# Altium PCB PCB.PcbDoc
Units mm, origin at the board's own origin, x right, y up, seen from the top; angles counter-clockwise.
Board outline 218.05 x 40.05 mm, 2 copper layers (Top Layer, Bottom Layer), stack 1.535 mm thick; 91 components, 70 nets, 452 pads, 108 vias.
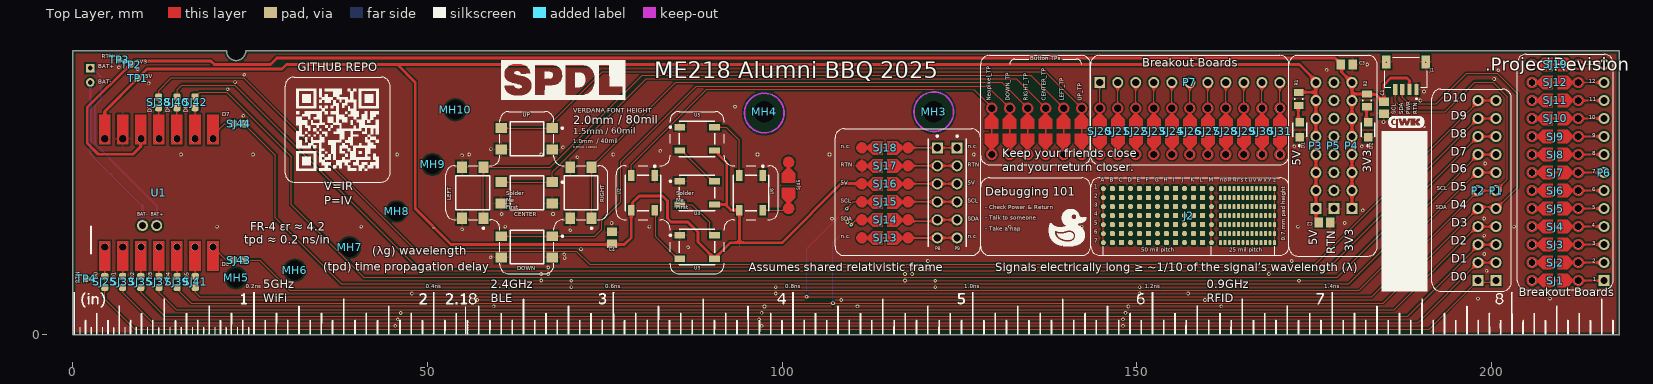
[diagram p0: Top Layer view]
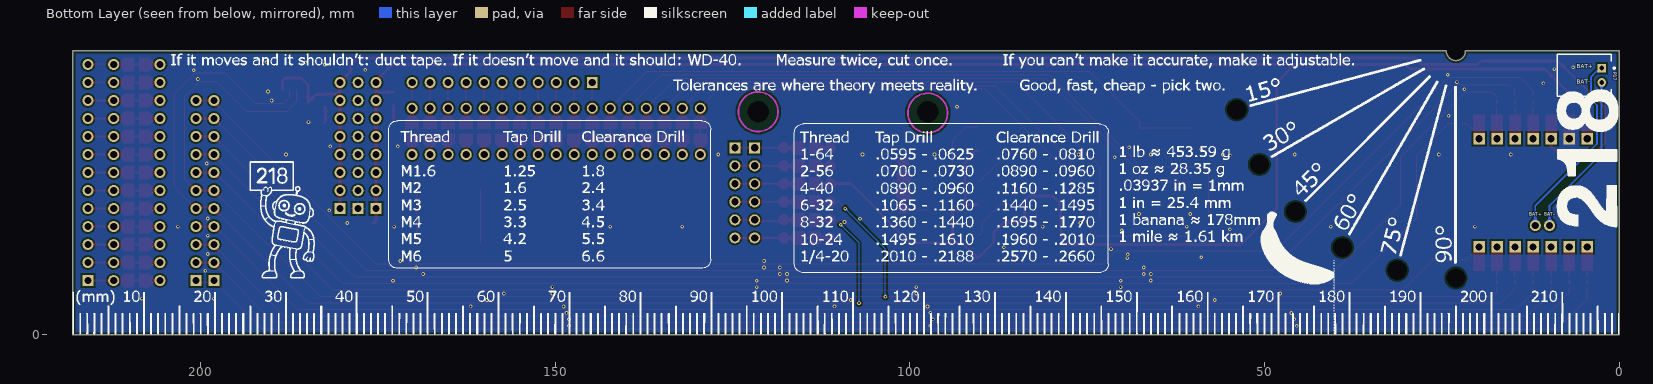
[diagram p1: Bottom Layer view, seen from below]

## Layer stack, top to bottom
Top Solder: solder mask 0.03, Solder Resist, Dk 4
Top Layer: signal copper 0.0175
Dielectric 3: core 1.5, Dk 4.2
Bottom Layer: signal copper 0.0175
Bottom Solder: solder mask 0.03, Solder Resist, Dk 4

## Board outline
0,-0.026 218,-0.026 218.026,0 218.026,40 218,40.026 24.376,40.026 24.349,40 cw(c23,40) 21.651,40 21.625,40.026 0,40.026 -0.026,40

## Design rules (kind name [scope] priority, off if disabled: settings)
AssemblyTestPointUsage [InNetClass('All Nets')] p1 off:
AssemblyTestpoint [(IsPad And (OnTopLayer Or OnBottomLayer)) Or (IsVia) Or (IsPad And OnMultiLayer)] p1 off: testpointundercomponent=FALSE minsize=1.016 maxsize=2.54 preferedsize=1.27 minholesize=0 maxholesize=1.905 preferedholesize=0.889 testpointgrid=2.54 usegrid=TRUE gridoriginx=25.4 gridoriginy=25.4 gridtolerance=0 allowsidetop=TRUE allowsidebottom=TRUE
BoardOutlineClearance BoardOutlineClearance_nosilk [All And Not OnLayer('Top Overlay') And Not OnLayer('Bottom Overlay')] p1: gap=0.381 ignorepadtopadclearanceinfootprint=FALSE
Clearance Clearance_analog [InNetClass('Analog')] p1: gap=0.127 ignorepadtopadclearanceinfootprint=FALSE
Clearance Clearance_digital [InNetClass('Digital')] p2: gap=0.127 ignorepadtopadclearanceinfootprint=FALSE
Clearance Clearance_polygon [InPolygon] p3: gap=0.254 ignorepadtopadclearanceinfootprint=FALSE
Clearance Clearance_Vias_to_Pads [(IsVia) vs (IsPad)] p4: gap=0.254 ignorepadtopadclearanceinfootprint=FALSE
Clearance [All] p5: gap=0.127 ignorepadtopadclearanceinfootprint=FALSE
DiffPairsRouting [All] p1: maxlimit=2.54 minlimit=0.152 mostfreqgap=0.254 toplayer_minwidth=0.152 toplayer_maxwidth=2.54 toplayer_prefwidth=0.254 bottomlayer_minwidth=0.152 bottomlayer_maxwidth=2.54 bottomlayer_prefwidth=0.254 maxuncoupledlength=12.7
FabricationTestPointUsage TestPointUsage [InNetClass('All Nets')] p1 off: valid=0 allowmultiple=FALSE
FabricationTestpoint Testpoint [(IsPad And (OnTopLayer Or OnBottomLayer)) Or (IsVia) Or (IsPad And OnMultiLayer)] p1 off: side=3 testpointundercomponent=TRUE minsize=0.762 maxsize=2.54 preferedsize=1.524 minholesize=0 maxholesize=1.27 preferedholesize=0.813 testpointgrid=0.635 allowsidetop=TRUE allowsidebottom=TRUE usegrid=TRUE gridoriginx=25.4 gridoriginy=25.4 gridtolerance=0
Height [All] p1 off: minheight=0 maxheight=25.4 prefheight=12.7
HoleSize [All] p1: absolutevalues=TRUE maxlimit=12.7 minlimit=0.203 maxpercent=80.000 minpercent=20.000
MinimumAnnularRing [All] p1: minimumring=0.127
MinimumSolderMaskSliver [All] p1 off: minsoldermaskwidth=0.127
PermittedLayers [All] p1: toplayerpermitted=TRUE bottomlayerpermitted=TRUE
PolygonConnect PolygonConnect_Via [All vs IsVia] p1: connectstyle=Direct reliefconductorwidth=0.254 reliefentries=4 polygonreliefangle="90 Angle" airgapwidth=0.254
PolygonConnect [All] p2: connectstyle=Relief reliefconductorwidth=0.254 reliefentries=4 polygonreliefangle="90 Angle" airgapwidth=0.254
RoutingVias [All] p1: holewidth=0.305 width=0.559 viastyle="Through Hole" minholewidth=0.203 minwidth=0.457 maxholewidth=12.7 maxwidth=17.78
SilkToSilkClearance [All] p1 off: silktosilkclearance=0.025
SilkToSolderMaskClearance SilkscreenOverComponentPads [IsPad] p1: minsilkscreentomaskgap=0.076 clearancetoexposedcopper=TRUE
SolderMaskExpansion SolderMaskExpansion_RequireTentedVias [IsVia] p1: expansion=0.102 istentingtop=TRUE
SolderMaskExpansion [All] p2 off: expansion=0.127 istentingtop=FALSE
SupplyNets "Schematic Supply Nets_3" [InNet('RTN')] p1: voltage=0.000
SupplyNets "Schematic Supply Nets_1" [InNet('3V3')] p2: voltage=0.000
SupplyNets "Schematic Supply Nets" [InNet('5V')] p3: voltage=0.000
UnRoutedNet [All] p1: checkbadconnections=TRUE
UnpouredPolygon [All] p1: allowunpoured=TRUE allowshelved=TRUE
Width [All] p1: maxlimit=25.4 minlimit=0.127 preferedwidth=0.152 checkconnectedcopper=TRUE
18 further rules are at their usual default settings.

## Classes and differential pairs
component class U_Main: C1 C2 C3 C4 CENTER CENTER_TP D1 D2 DOWN DOWN_TP J1 J2 LEFT LEFT_TP Neopixel_TP P1 P2 P3 P4 P5 P6 P7 P8 P9 P17 R1 R2 RIGHT RIGHT_TP SJ1 SJ2 SJ3 SJ4 SJ5 SJ6 SJ7 SJ8 SJ9 SJ10 SJ11 SJ12 SJ13 SJ14 SJ15 SJ16 SJ17 SJ18 SJ19 SJ20 SJ21 SJ22 SJ23 SJ24 SJ25 SJ26 SJ27 SJ28 SJ29 SJ30 SJ31 SJ33 SJ35 SJ37 SJ38 SJ39 SJ40 SJ41 SJ42 SJ43 SJ44 SJ45 TP1 TP2 TP3 TP4 U1 U2 U3 U4 U5 U6 UP UP_TP
component class U_Top: MH3 MH4 MH5 MH6 MH7 MH8 MH9 MH10

## Components (designator, comment, footprint, x,y, rotation, side; value= is the part's Value field where it differs from the comment)
C1 "Multilayer Ceramic Capacitor, 1 uF, 50 V, ± 10%, X7R, 0805" FP-GRM21B-0_15-IPC_B 184.836,32 r270 top value=1uF
C2 "Multilayer Ceramic Capacitor, 1 uF, 50 V, ± 10%, X7R, 0805" FP-GRM21B-0_15-IPC_B 176.467,15.791 r0 top value=1uF
C3 "Multilayer Ceramic Capacitor, 1 uF, 50 V, ± 10%, X7R, 0805" FP-GRM21B-0_15-IPC_B 179.613,38.1 r0 top value=1uF
C4 "Multilayer Ceramic Capacitor, 1 uF, 50 V, ± 10%, X7R, 0805" FP-GRM21B-0_15-IPC_B 76.003,13.659 r90 top value=1uF
CENTER "TL3305AF260QG" FP-TL3305AF260QG-MFG 64,20 r180 top
CENTER_TP "SJ CUSTOM and TH NC" "SJ CUSTOM and TH NC" 137.16,28.66 r90 top net-tie
D1 "LSR976-NR-1" FP-LS_R976-MFG 172.963,28.909 r90 top
D2 "LYR976-PS-36" FP-LS_R976-MFG 182.609,28.872 r90 top
DOWN "TL3305AF260QG" FP-TL3305AF260QG-MFG 64,12.38 r180 top
DOWN_TP "SJ CUSTOM and TH NC" "SJ CUSTOM and TH NC" 132.08,28.66 r90 top net-tie
J1 "QWIIC JST CONNECTOR" SPARKFUN_PRT-14417 187.952,37.01 r180 top
J2 "ProtoPads" "New footprint 1" 145.295,20.596 r0 top
LEFT "TL3305AF260QG" FP-TL3305AF260QG-MFG 56.38,20 r90 top
LEFT_TP "SJ CUSTOM and TH NC" "SJ CUSTOM and TH NC" 139.7,28.66 r90 top net-tie
MH3 "PTH 4-40 Close Fit" "mount hole 4-40 Close"#1 121.376,31.43 r0 top
MH4 "PTH 4-40 Close Fit" "mount hole 4-40 Close"#2 97.475,31.252 r270 top locked
MH5 "2.7mm hole" "2.7mm hole (no keepout)" 23,8 r0 top locked
MH6 "2.7mm hole" "2.7mm hole (no keepout)" 31.28,9.09 r0 top locked
MH7 "2.7mm hole" "2.7mm hole (no keepout)" 39,12.29 r0 top locked
MH8 "2.7mm hole" "2.7mm hole (no keepout)" 45.63,17.37 r0 top locked
MH9 "2.7mm hole" "2.7mm hole (no keepout)" 50.71,24 r0 top locked
MH10 "2.7mm hole" "2.7mm hole (no keepout)" 53.91,31.72 r0 top locked
Neopixel_TP "SJ CUSTOM and TH NC" "SJ CUSTOM and TH NC" 129.54,28.66 r90 top net-tie
P1 "HDR 11 POS 100mil 2.54mm" "HDR 11 POS 100mil 2.54mm no outline" 200.66,7.62 r90 top
P2 "HDR 11 POS 100mil 2.54mm" "HDR 11 POS 100mil 2.54mm no outline" 198.12,7.62 r90 top
P3 "HDR 08 POS 100mil 2.54mm" "HDR 08 POS 100mil 2.54mm no outline" 175.26,17.78 r90 top
P4 "HDR 08 POS 100mil 2.54mm" "HDR 08 POS 100mil 2.54mm no outline" 180.34,17.78 r90 top
P5 "HDR 08 POS 100mil 2.54mm" "HDR 08 POS 100mil 2.54mm no outline" 177.8,17.78 r90 top
P6 "HDR 13 POS 100mil 2.54mm" "HDR 13 POS 100mil 2.54mm No Outline" 215.9,7.62 r90 top
P7 "HDR 11 POS 100mil 2.54mm" "HDR 11 POS 100mil 2.54mm no outline" 144.78,35.56 r0 top
P8 "HDR 06 POS 100mil 2.54mm" "HDR 06 POS 100mil 2.54mm" 121.88,26.35 r270 top
P9 "HDR 06 POS 100mil 2.54mm" "HDR 06 POS 100mil 2.54mm" 124.67,26.35 r270 top
P17 "S2B-PH-K-S(LF)(SN)" JST-S2B-PH-K-S_V 4.885,36.575 r270 bottom
R1 "SMD Chip Resistor, 300 Ohm, ± 1%, 125 mW, 0805" RESC2013X60X35NL10T20 172.82,33.241 r270 top value=300
R2 "SMD Chip Resistor, 130 Ohm, ±1%, 125 mW, 0805" RESC2013X60X35NL10T20 182.466,33.042 r270 top value=130
RIGHT "TL3305AF260QG" FP-TL3305AF260QG-MFG 71.62,20 r90 top
RIGHT_TP "SJ CUSTOM and TH NC" "SJ CUSTOM and TH NC" 134.62,28.66 r90 top net-tie
SJ1 "SJ CUSTOM and TH NC" "SJ CUSTOM and TH NC" 209.001,7.62 r0 top net-tie
SJ2 "SJ CUSTOM and TH NC" "SJ CUSTOM and TH NC" 209.001,10.16 r0 top net-tie
SJ3 "SJ CUSTOM and TH NC" "SJ CUSTOM and TH NC" 209.001,12.7 r0 top net-tie
SJ4 "SJ CUSTOM and TH NC" "SJ CUSTOM and TH NC" 209.001,15.24 r0 top net-tie
SJ5 "SJ CUSTOM and TH NC" "SJ CUSTOM and TH NC" 209.001,17.78 r0 top net-tie
SJ6 "SJ CUSTOM and TH NC" "SJ CUSTOM and TH NC" 209.001,20.32 r0 top net-tie
SJ7 "SJ CUSTOM and TH NC" "SJ CUSTOM and TH NC" 209.001,22.86 r0 top net-tie
SJ8 "SJ CUSTOM and TH NC" "SJ CUSTOM and TH NC" 209.001,25.4 r0 top net-tie
SJ9 "SJ CUSTOM and TH NC" "SJ CUSTOM and TH NC" 209.001,27.94 r0 top net-tie
SJ10 "SJ CUSTOM and TH NC" "SJ CUSTOM and TH NC" 209.001,30.48 r0 top net-tie
SJ11 "SJ CUSTOM and TH NC" "SJ CUSTOM and TH NC" 209.001,33.02 r0 top net-tie
SJ12 "SJ CUSTOM and TH NC" "SJ CUSTOM and TH NC" 209.001,35.56 r0 top net-tie
SJ13 "SJ CUSTOM SMD NC" "SJ CUSTOM SMD NC" 114.5,13.65 r0 top net-tie
SJ14 "SJ CUSTOM SMD NC" "SJ CUSTOM SMD NC" 114.5,16.19 r0 top net-tie
SJ15 "SJ CUSTOM SMD NC" "SJ CUSTOM SMD NC" 114.5,18.73 r0 top net-tie
SJ16 "SJ CUSTOM SMD NC" "SJ CUSTOM SMD NC" 114.5,21.27 r0 top net-tie
SJ17 "SJ CUSTOM SMD NC" "SJ CUSTOM SMD NC" 114.5,23.81 r0 top net-tie
SJ18 "SJ CUSTOM SMD NC" "SJ CUSTOM SMD NC" 114.5,26.35 r0 top net-tie
SJ19 "SJ CUSTOM and TH NC" "SJ CUSTOM and TH NC" 209.001,38.1 r0 top net-tie
SJ20 "SJ CUSTOM and TH NO" "SJ CUSTOM and TH NO" 144.78,28.66 r90 top net-tie
SJ21 "SJ CUSTOM and TH NO" "SJ CUSTOM and TH NO" 147.32,28.66 r90 top net-tie
SJ22 "SJ CUSTOM and TH NO" "SJ CUSTOM and TH NO" 149.86,28.66 r90 top net-tie
SJ23 "SJ CUSTOM and TH NO" "SJ CUSTOM and TH NO" 152.4,28.66 r90 top net-tie
SJ24 "SJ CUSTOM and TH NO" "SJ CUSTOM and TH NO" 154.94,28.66 r90 top net-tie
SJ25 "Solder Jumper 0603 Normally Closed" "SolderJumper SPST NC 0603" 4.508,7.431 r90 top net-tie
SJ26 "SJ CUSTOM and TH NO" "SJ CUSTOM and TH NO" 157.48,28.66 r90 top net-tie
SJ27 "SJ CUSTOM and TH NO" "SJ CUSTOM and TH NO" 160.02,28.66 r90 top net-tie
SJ28 "SJ CUSTOM and TH NO" "SJ CUSTOM and TH NO" 162.56,28.66 r90 top net-tie
SJ29 "SJ CUSTOM and TH NO" "SJ CUSTOM and TH NO" 165.1,28.66 r90 top net-tie
SJ30 "SJ CUSTOM and TH NO" "SJ CUSTOM and TH NO" 167.64,28.66 r90 top net-tie
SJ31 "SJ CUSTOM and TH NO" "SJ CUSTOM and TH NO" 170.18,28.66 r90 top net-tie
SJ33 "Solder Jumper 0603 Normally Closed" "SolderJumper SPST NC 0603" 7.01,7.431 r90 top net-tie
SJ35 "Solder Jumper 0603 Normally Closed" "SolderJumper SPST NC 0603" 9.576,7.431 r90 top net-tie
SJ37 "Solder Jumper 0603 Normally Closed" "SolderJumper SPST NC 0603" 12.141,7.431 r90 top net-tie
SJ38 "Solder Jumper 0603 Normally Closed" "SolderJumper SPST NC 0603" 12.103,32.766 r90 top net-tie
SJ39 "Solder Jumper 0603 Normally Closed" "SolderJumper SPST NC 0603" 14.707,7.431 r90 top net-tie
SJ40 "Solder Jumper 0603 Normally Closed" "SolderJumper SPST NC 0603" 14.673,32.766 r90 top net-tie
SJ41 "Solder Jumper 0603 Normally Closed" "SolderJumper SPST NC 0603" 17.272,7.431 r90 top net-tie
SJ42 "Solder Jumper 0603 Normally Closed" "SolderJumper SPST NC 0603" 17.242,32.766 r90 top net-tie
SJ43 "Solder Jumper 0603 Normally Closed" "SolderJumper SPST NC 0603" 23.368,10.541 r180 top net-tie
SJ44 "Solder Jumper 0603 Normally Closed" "SolderJumper SPST NC 0603" 23.36,29.718 r0 top net-tie
SJ45 "SJ CUSTOM SMD NO" "SJ CUSTOM SMD NO" 100.911,21.057 r90 top net-tie
TP1 "Testpoint 35mil SMT Round" "Testpoint Round 35mil" 9.162,36.162 r0 top
TP2 "Testpoint 35mil SMT Round" "Testpoint Round 35mil" 8.211,38.091 r0 top
TP3 "Testpoint 35mil SMT Round" "Testpoint Round 35mil" 6.501,38.796 r0 top
TP4 "Testpoint 35mil SMT Round" "Testpoint Round 35mil" 1.905,7.874 r0 top
U1 "Seeedstudio XIAO" "Seeeduino XIAO-Footprint-Both" 4.483,12.38 r90 top locked
U2 "1655 NeoPixel 5050 RGB LED" ADA-RGB-1655_V 80.38,20 r270 top
U3 "1655 NeoPixel 5050 RGB LED" ADA-RGB-1655_V 88,12.38 r0 top
U4 "1655 NeoPixel 5050 RGB LED" ADA-RGB-1655_V 88,20 r0 top
U5 "1655 NeoPixel 5050 RGB LED" ADA-RGB-1655_V 88,27.62 r0 top
U6 "1655 NeoPixel 5050 RGB LED" ADA-RGB-1655_V 95.62,20 r270 top
UP "TL3305AF260QG" FP-TL3305AF260QG-MFG 64,27.62 r180 top
UP_TP "SJ CUSTOM and TH NC" "SJ CUSTOM and TH NC" 142.24,28.66 r90 top net-tie

## Footprints (in the part's own frame and the unit in brackets; to place one, negate y for a bottom-side part, rotate by r counter-clockwise, add the part's x,y. Pads: shape width x height; smd on the part's side, far side on the other; paste and mask are expansions set on the pad)
"2.7mm hole (no keepout)" [mm]
  round 0 hole 2.7 unplated paste-2539.97: 1(0,0)
ADA-RGB-1655_V [mm] "SMD, 4-Leads, Body 5x5mm"
  rect 1.5x0.9 smd: 1(-2.45,1.65) 2(-2.45,-1.65) 3(2.45,-1.65) 4(2.45,1.65)
  silkscreen extent -3.87,-2.5 2.5,2.5, body extent -2.7,-2.5 2.7,2.5, height 1.68
FP-GRM21B-0_15-IPC_B [mm]
  rect 1.206x1.408 smd paste+0 mask+0: 1(-0.826,0) 2(0.826,0)
  body extent -1.68,-0.95 1.68,0.95, height 0.25
FP-LS_R976-MFG [mm]
  rect 1.2x1.2 smd paste+0 mask+0: 1(-1.05,0) 2(1.05,0)
  silkscreen extent -2.37,-0.97 1,0.97, body extent -1.75,-0.8 1.75,0.8, height 0.25
FP-TL3305AF260QG-MFG [mm]
  rect 1.6x1.4 smd paste+0 mask+0: 1(-3.6,-1.5) 2(3.6,-1.5) 3(-3.6,1.5) 4(3.6,1.5)
  silkscreen extent -5.13,-2.37 2.37,2.37, body extent -4.5,-2.47 4.5,2.47, height 0.25
"HDR 06 POS 100mil 2.54mm" [mm] "THD, 06-Leads, 1.55mm pad, 1.016mm hole, Pitch 2.54mm"
  rect 1.55x1.55 hole 1.016: 1(0,0)
  round 1.55 hole 1.016: 2(2.54,0) 3(5.08,0) 4(7.62,0) 5(10.16,0) 6(12.7,0)
  silkscreen extent -1.77,-1.27 13.97,0.13
"HDR 08 POS 100mil 2.54mm no outline" [mm] "THD, 08-Leads, 1.55mm pad, 1.016mm hole, Pitch 2.54mm"
  rect 1.55x1.55 hole 1.016: 1(0,0)
  round 1.55 hole 1.016: 2(2.54,0) 3(5.08,0) 4(7.62,0) 5(10.16,0) 6(12.7,0) 7(15.24,0) 8(17.78,0)
"HDR 11 POS 100mil 2.54mm no outline" [mm] "THD, 11-Leads, 1.55mm pad, 1.016mm hole, Pitch 2.54mm"
  rect 1.55x1.55 hole 1.016: 1(0,0)
  round 1.55 hole 1.016: 2(2.54,0) 3(5.08,0) 4(7.62,0) 5(10.16,0) 6(12.7,0) 7(15.24,0) 8(17.78,0) 9(20.32,0) 10(22.86,0) 11(25.394,0.002)
"HDR 13 POS 100mil 2.54mm No Outline" [mm] "THD, 13-Leads, 1.55mm pad, 1.016mm hole, Pitch 2.54mm No Outline"
  rect 1.55x1.55 hole 1.016: 1(0,0)
  round 1.55 hole 1.016: 2(2.54,0) 3(5.08,0) 4(7.62,0) 5(10.16,0) 6(12.7,0) 7(15.24,0) 8(17.78,0) 9(20.32,0) 10(22.86,0) 11(25.4,0) 12(27.94,0) 13(30.48,0)
JST-S2B-PH-K-S_V [mm] "THD, 2-Leads, Body 7.6x5.9mm, Pitch 2mm"
  rect 1.2x1.2 hole 0.7: 1(-1,2.45)
  round 1.2 hole 0.7: 2(1,2.45)
  silkscreen extent -2.95,-3.8 2.95,4.35, body extent -2.95,-3.8 2.95,3.8, height 4.8
"mount hole 4-40 Close"#1 [mil] "Screw Mounting Hole for 4-40 screw Close"
  round 0 hole 119 unplated paste-99999: 1(0,0)
  Keep-Out Layer circle w10: c0,0 r110
"mount hole 4-40 Close"#2 [mil] "Screw Mounting Hole for 4-40 screw Close"
  round 0 hole 119 unplated paste-99999: 1(-7.01,0.04)
  Keep-Out Layer circle w10: c0,0 r110
"New footprint 1" [mm]
  oct 0.7x0.7 smd mask-0.076: 1(3.81,-7.62) 1(3.81,-6.35) 1(3.81,-5.08) 1(3.81,-3.81) 1(3.81,-2.54) 1(3.81,-1.27) 1(3.81,0) 1(7.62,-7.62) 1(7.62,-6.35) 1(7.62,-5.08) 1(7.62,-3.81) 1(7.62,-2.54) 1(7.62,-1.27) 1(7.62,0) 1(11.43,-7.62) 1(11.43,-6.35) 1(11.43,-5.08) 1(11.43,-3.81) 1(11.43,-2.54) 1(11.43,-1.27) 1(11.43,0)
  round 0.7 smd mask-0.076: 1(15.24,-7.62) 1(15.24,-6.35) 1(15.24,-5.08) 1(15.24,-3.81) 1(15.24,-2.54) 1(15.24,-1.27) 1(15.24,0) A1(0,0) A2(0,-1.27) A3(0,-2.54) A4(0,-3.81) A5(0,-5.08) A6(0,-6.35) A7(0,-7.62)
  oct 0.381x0.7 smd mask-0.076: 1(17.78,-7.62) 1(17.78,-6.35) 1(17.78,-5.08) 1(17.78,-3.81) 1(17.78,-2.54) 1(17.78,-1.27) 1(17.78,0) 1(19.685,-7.62) 1(19.685,-6.35) 1(19.685,-5.08) 1(19.685,-3.81) 1(19.685,-2.54) 1(19.685,-1.27) 1(19.685,0) 1(21.59,-7.62) 1(21.59,-6.35) 1(21.59,-5.08) 1(21.59,-3.81) 1(21.59,-2.54) 1(21.59,-1.27) 1(21.59,0) 1(23.495,-7.62) 1(23.495,-6.35) 1(23.495,-5.08) 1(23.495,-3.81) 1(23.495,-2.54) 1(23.495,-1.27) 1(23.495,0)
  rrect50% 0.7x0.7 smd mask-0.076: 2(5.08,-7.62) 2(5.08,-6.35) 2(5.08,-5.08) 2(5.08,-3.81) 2(5.08,-2.54) 2(5.08,-1.27) 2(5.08,0) 2(8.89,-7.62) 2(8.89,-6.35) 2(8.89,-5.08) 2(8.89,-3.81) 2(8.89,-2.54) 2(8.89,-1.27) 2(8.89,0) 2(12.7,-7.62) 2(12.7,-6.35) 2(12.7,-5.08) 2(12.7,-3.81) 2(12.7,-2.54) 2(12.7,-1.27) 2(12.7,0) B1(1.27,0) B2(1.27,-1.27) B3(1.27,-2.54) B4(1.27,-3.81) B5(1.27,-5.08) B6(1.27,-6.35) B7(1.27,-7.62)
  rrect50% 0.381x0.7 smd mask-0.076: 2(16.51,-7.62) 2(16.51,-6.35) 2(16.51,-5.08) 2(16.51,-3.81) 2(16.51,-2.54) 2(16.51,-1.27) 2(16.51,0) 2(18.415,-7.62) 2(18.415,-6.35) 2(18.415,-5.08) 2(18.415,-3.81) 2(18.415,-2.54) 2(18.415,-1.27) 2(18.415,0) 2(20.32,-7.62) 2(20.32,-6.35) 2(20.32,-5.08) 2(20.32,-3.81) 2(20.32,-2.54) 2(20.32,-1.27) 2(20.32,0) 2(22.225,-7.62) 2(22.225,-6.35) 2(22.225,-5.08) 2(22.225,-3.81) 2(22.225,-2.54) 2(22.225,-1.27) 2(22.225,0) 2(24.13,-7.62) 2(24.13,-6.35) 2(24.13,-5.08) 2(24.13,-3.81) 2(24.13,-2.54) 2(24.13,-1.27) 2(24.13,0)
  rect 0.7x0.7 smd mask-0.076: 3(6.35,-7.62) 3(6.35,-6.35) 3(6.35,-5.08) 3(6.35,-3.81) 3(6.35,-2.54) 3(6.35,-1.27) 3(6.35,0) 3(10.16,-7.62) 3(10.16,-6.35) 3(10.16,-5.08) 3(10.16,-3.81) 3(10.16,-2.54) 3(10.16,-1.27) 3(10.16,0) 3(13.97,-7.62) 3(13.97,-6.35) 3(13.97,-5.08) 3(13.97,-3.81) 3(13.97,-2.54) 3(13.97,-1.27) 3(13.97,0) C1(2.54,0) C2(2.54,-1.27) C3(2.54,-2.54) C4(2.54,-3.81) C5(2.54,-5.08) C6(2.54,-6.35) C7(2.54,-7.62)
  rect 0.381x0.7 smd mask-0.076: 3(17.145,-7.62) 3(17.145,-6.35) 3(17.145,-5.08) 3(17.145,-3.81) 3(17.145,-2.54) 3(17.145,-1.27) 3(17.145,0) 3(19.05,-7.62) 3(19.05,-6.35) 3(19.05,-5.08) 3(19.05,-3.81) 3(19.05,-2.54) 3(19.05,-1.27) 3(19.05,0) 3(20.955,-7.62) 3(20.955,-6.35) 3(20.955,-5.08) 3(20.955,-3.81) 3(20.955,-2.54) 3(20.955,-1.27) 3(20.955,0) 3(22.86,-7.62) 3(22.86,-6.35) 3(22.86,-5.08) 3(22.86,-3.81) 3(22.86,-2.54) 3(22.86,-1.27) 3(22.86,0)
  Top Layer lines w0.127: 0,-7.62 0,0 ; 15.24,-7.62 15.24,0 ; 24.13,-7.62 24.13,0
  silkscreen extent -1.78,-9.4 26.16,1.52, body extent 0.67,-8.22 24.98,0.48, height 1.85
RESC2013X60X35NL10T20 [mm] "Chip Resistor, 2-Leads, Body 2.1x1.35mm, IPC Medium Density"
  rect 1x1.35 smd: 1(-0.9,0) 2(0.9,0)
  silkscreen extent -0.1,-0.58 0.1,0.58, body extent -1.05,-0.68 1.05,0.67, height 0.6
"Seeeduino XIAO-Footprint-Both" [mm]
  round 1.025 / inner round 1.478 / far side rect 1.6x1.6 hole 1: 1(0,0) 2(0,-2.54) 3(0,-5.08) 4(0,-7.62) 5(0,-10.16) 6(0,-12.7) 7(0,-15.24) 8(15.24,-15.24) 9(15.24,-12.7) 10(15.24,-10.16) 11(15.24,-7.62) 12(15.24,-5.08) 13(15.24,-2.54) 14(15.24,0)
  round 1.55 hole 1.016: 15(3,-7.317) 16(3,-5.317)
  Top Layer region: -3.4,0.8 -3.4,-0.8 0.8,-0.8 0.8,0.8 0.8,0.8
  Top Layer region: -3.4,-1.74 -3.4,-3.34 0.8,-3.34 0.8,-1.74 0.8,-1.74
  Top Layer region: -3.4,-4.28 -3.4,-5.88 0.8,-5.88 0.8,-4.28 0.8,-4.28
  Top Layer region: -3.4,-6.82 -3.4,-8.42 0.8,-8.42 0.8,-6.82 0.8,-6.82
  Top Layer region: -3.4,-9.36 -3.4,-10.96 0.8,-10.96 0.8,-9.36 0.8,-9.36
  Top Layer region: -3.4,-11.9 -3.4,-13.5 0.8,-13.5 0.8,-11.9 0.8,-11.9
  Top Layer region: -3.4,-14.44 -3.4,-16.04 0.8,-16.04 0.8,-14.44 0.8,-14.44
  Top Layer region: 18.64,-16.04 18.64,-14.44 14.44,-14.44 14.44,-16.04 14.44,-16.04
  Top Layer region: 18.64,-13.5 18.64,-11.9 14.44,-11.9 14.44,-13.5 14.44,-13.5
  Top Layer region: 18.64,-10.96 18.64,-9.36 14.44,-9.36 14.44,-10.96 14.44,-10.96
  Top Layer region: 18.64,-8.42 18.64,-6.82 14.44,-6.82 14.44,-8.42 14.44,-8.42
  Top Layer region: 18.64,-5.88 18.64,-4.28 14.44,-4.28 14.44,-5.88 14.44,-5.88
  Top Layer region: 18.64,-3.34 18.64,-1.74 14.44,-1.74 14.44,-3.34 14.44,-3.34
  Top Layer region: 18.64,-0.8 18.64,0.8 14.44,0.8 14.44,-0.8 14.44,-0.8
  body extent -1.27,-18.28 16.63,4.32, height 4.5
"SJ CUSTOM and TH NC" [mm]
  round 1.045 / inner round 1.397 / far side round 1.55 hole 1.02 mask-0.762: 1(-3.26,0) 2(3.26,0)
  Top Layer region: 2.507,0.182 1.736,0.953 0.339,0.953 0.339,-0.953 1.736,-0.952 2.507,-0.182 2.678,-0.512 2.983,-0.724 3.352,-0.77 3.7,-0.639 3.946,-0.361 4.035,0 3.946,0.361 3.7,0.639 3.352,0.77 2.983,0.724 2.678,0.512 2.507,0.182
  Top Layer region: -2.507,-0.182 -1.736,-0.953 -0.339,-0.953 -0.339,0.953 -1.736,0.952 -2.507,0.182 -2.678,0.512 -2.983,0.724 -3.352,0.77 -3.7,0.639 -3.946,0.361 -4.035,0 -3.946,-0.361 -3.7,-0.639 -3.352,-0.77 -2.983,-0.724 -2.678,-0.512 -2.507,-0.182
  Top Layer lines w0.254: -0.381,0 0.381,0
"SJ CUSTOM and TH NO" [mm]
  round 1.045 / inner round 1.397 / far side round 1.55 hole 1.02 mask-0.762: 1(-3.26,0) 2(3.26,0)
  Top Layer region: -2.507,-0.182 -1.736,-0.953 -0.339,-0.953 -0.339,0.953 -1.736,0.952 -2.507,0.182 -2.678,0.512 -2.983,0.724 -3.352,0.77 -3.7,0.639 -3.946,0.361 -4.035,0 -3.946,-0.361 -3.7,-0.639 -3.352,-0.77 -2.983,-0.724 -2.678,-0.512 -2.507,-0.182
  Top Layer region: 2.507,0.182 1.736,0.953 0.339,0.953 0.339,-0.953 1.736,-0.952 2.507,-0.182 2.678,-0.512 2.983,-0.724 3.352,-0.77 3.7,-0.639 3.946,-0.361 4.035,0 3.946,0.361 3.7,0.639 3.352,0.77 2.983,0.724 2.678,0.512 2.507,0.182
"SJ CUSTOM SMD NC" [mil]
  round 1 smd paste-99999 mask-20: 1(-128.37,0) 2(128.36,0)
  Top Layer region: 98.71,7.16 68.36,37.5 13.36,37.5 13.36,-37.5 68.36,-37.5 98.71,-7.16 105.45,-20.14 117.45,-28.49 131.97,-30.3 145.66,-25.14 155.37,-14.2 158.88,0 155.37,14.2 145.66,25.14 131.97,30.3 117.45,28.49 105.45,20.14 98.71,7.16
  Top Layer region: -98.71,-7.16 -68.37,-37.5 -13.37,-37.5 -13.37,37.5 -68.37,37.5 -98.71,7.16 -105.45,20.14 -117.45,28.49 -131.97,30.3 -145.66,25.14 -155.37,14.2 -158.88,0 -155.37,-14.2 -145.66,-25.14 -131.97,-30.3 -117.45,-28.49 -105.45,-20.14 -98.71,-7.16
  Top Layer lines w10: -15,0 15,0
"SJ CUSTOM SMD NO" [mil]
  round 1 smd paste-99999 mask-20: 1(-128.37,0) 2(128.37,0)
  Top Layer region: -98.71,-7.16 -68.37,-37.5 -13.37,-37.5 -13.37,37.5 -68.37,37.5 -98.71,7.16 -105.45,20.14 -117.45,28.49 -131.97,30.3 -145.66,25.14 -155.37,14.2 -158.88,0 -155.37,-14.2 -145.66,-25.14 -131.97,-30.3 -117.45,-28.49 -105.45,-20.14 -98.71,-7.16
  Top Layer region: 98.71,7.16 68.37,37.5 13.37,37.5 13.37,-37.5 68.37,-37.5 98.71,-7.16 105.45,-20.14 117.45,-28.49 131.97,-30.3 145.66,-25.14 155.37,-14.2 158.88,0 155.37,14.2 145.66,25.14 131.97,30.3 117.45,28.49 105.45,20.14 98.71,7.16
"SolderJumper SPST NC 0603" [mil] "SolderJumper SPST NC 0603"
  rrect50% 40x40 smd paste-50: 1(-30,0.98) 2(30,0.98)
  Top Layer region: -11,4 -11,-2 11,-2 11,4
SPARKFUN_PRT-14417 [mm]
  rect 0.6x1.55 smd: 1(-1.5,2.45) 2(-0.5,2.45) 3(0.5,2.45) 4(1.5,2.45)
  rect 1.2x1.8 smd: S1(-2.8,-1.425) S2(2.8,-1.425)
  silkscreen extent -3,-2.12 3,3.85, body extent -3,-2.12 3,2.83, height 3.25
"Testpoint Round 35mil" [mil] "Testpoint Round 35mil"
  round 35 smd paste-393.7: 1(0,0)

## Part data
C1 C2 C3 C4: library part CMP-001-00115-11, "Multilayer Ceramic Capacitor, 1 uF, 50 V, ± 10%, X7R, 0805 [2012 Metric]", Case Code (Imperial)=0805, Case Code (Metric)=2012, Dielectric=X7R, Max Operating Temperature=125°C, Min Operating Temperature=-55°C, Package Quantity=10000, Ratings=AEC-Q200, Tolerance=10%, Voltage Rating=50V, Case/Package=0805, Height=1.25mm, Length=0.079inch, Mounting Technology="Surface Mount", Packaging="Tape and Reel", RoHS Compliant=Yes, Series=GCM, Termination=SMD/SMT, Thickness=0.055inch, Voltage Rating (DC)=50V, Weight=0.000335oz, Width=0.049inch
CENTER DOWN LEFT RIGHT UP: library part CMP-011-00020-1, "Keypad Switch, 1 Switches, SPST, Momentary-tactile, 0.05A, 12VDC, 2.45N, Solder Terminal, Surface Mount-straight", RoHS Compliant=Yes
CENTER_TP DOWN_TP LEFT_TP Neopixel_TP RIGHT_TP SJ1 SJ2 SJ3 SJ4 SJ5 SJ6 SJ7 SJ8 SJ9 SJ10 SJ11 SJ12 SJ19 UP_TP: library part CMP-00027-10, "Normally closed custom pad and TH pads"
D1: library part CMP-007-00039-2, "0805 Single Color LED, Super Red, Colorless Diffused, 1.3mm", Forward Voltage=2.5V, Max Operating Temperature=85°C, Min Operating Temperature=-30°C, Mounting Technology="Surface Mount", Pins=2, RoHS Compliant=Yes
D2: library part CMP-007-00044-2, "0805 Single Color LED, Yellow, Colorless Diffused, 1.3mm", Forward Voltage=2.5V, Max Operating Temperature=85°C, Min Operating Temperature=-30°C, Mounting Technology="Surface Mount", Pins=2, RoHS Compliant=Yes
J1: library part CMP-00057-2, "QWIIC JST CONNECTOR - SMD 4-PIN", Package=None, Check_prices=https://www.snapeda.com/parts/PRT-14417/SparkFun+Electronics/view-part/?ref=eda, Component Type=Standard, Design Item ID=PRT-14417, MF="SparkFun Electronics", MP=PRT-14417, Pin Count=4, SnapEDA_Link=https://www.snapeda.com/parts/PRT-14417/SparkFun+Electronics/view-part/?ref=snap, Source=PRT-14417.SchLib
J2: library part CMP-00059-2, "Soldermask defined 27 x 7 SMT Pads Array Solder Mask Defined 50 mil and 25 mil pitch 0.7mm pad"
MH3 MH4: library part CMP-104-000005-1, "4-40 PAN HEAD SCREW CLOSE FIT", Created by=Kuan, Design Item ID="PTH 4-40 Close Fit", Source=Holes.SchLib
MH5 MH6 MH7 MH8 MH9 MH10: library part CMP-00052-1, "2.7mm hole (no keepout) M2.5 tight", Component Type="Standard (No BOM)", Created by=Kylee, Pin Count=0
P1 P2 P7: library part CMP-00053-2
P3 P4 P5: library part CMP-00039-2
P6: library part CMP-00055-1
P8 P9: library part CMP-00040-1
P17: library part CMP-002-00030-3, "Header for PCB; pitch 2.00mm; 2-contacts; THT; male; side entry; 100V/2A", Case/Package=S2B-PH-K-S, Color=Natural,White, Contact Resistance=20mR, Current Rating=2A, Flammability Rating="UL94 V-0", Housing Color=White, Insulation Resistance=1GR, Manufacturer="Japan Solderless Terminals", Max Operating Temperature=85°C, Max Voltage Rating (AC)=100V, Min Operating Temperature=-25°C, Package Description="Male Header, Pitch 2 mm, 1 x 2 Position, Height 4.8 mm, Tail Length 3.4 mm", Connector Type=Header, Contact Material=Brass,Tin,Bronze, Contact Mating Length=0.13inch, Contact Plating=Tin,Copper, Contact Type="Male Pin", Datasheet URL=http://www.jst-mfg.com/product/pdf/eng/ePH.pdf, Datasheet Version=Dec-12, Depth=7.6mm, Fastening Type=Detent, Gender=Male, Height=9.4mm, Housing Material=Polyamide, Lead Free="Lead Free", Lead Pitch=2mm, Length=5.9mm, Max Current Rating=2A, Max Voltage Rating (DC)=100V, Mounting Technology="Through Hole", Number of Contacts=2, Number of Poles=2, Number of Positions=2, Number of Rows=1, Orientation="Right Angle", Package Reference=S2B-PH-K-S, Packaging=Bulk, Pins=2, Pitch=2mm, Reach SVHC Compliant=No, RoHS Compliant=Unknown, Series=PH, Termination=Solder, Voltage Rating=100V, Voltage Rating (AC)=100V, Width=4.5mm, Working Voltage=100V
R1: library part CMP-009-00313-2, "SMD Chip Resistor, 300 Ohm, ± 1%, 125 mW, 0805 [2012 Metric], Thin Film, General Purpose", Case/Package=0805, Max Operating Temperature=155°C, Min Operating Temperature=-55°C, Power=125mW, Tolerance=1%, Mounting Technology="Surface Mount", Pins=2, RoHS Compliant=Yes
R2: library part CMP-009-00312-2, "SMD Chip Resistor, 130 Ohm, ± 1%, 125 mW, 0805 [2012 Metric], Thick Film, Automotive", Case/Package=0805, Max Operating Temperature=155°C, Min Operating Temperature=-55°C, Power=125mW, Tolerance=1%, Mounting Technology="Surface Mount", Pins=2, RoHS Compliant=Yes
SJ13 SJ14 SJ15 SJ16 SJ17 SJ18: library part CMP-00056-3, "Normally closed custom pad surface mount"
SJ20 SJ21 SJ22 SJ23 SJ24 SJ26 SJ27 SJ28 SJ29 SJ30 SJ31: library part CMP-00028-2, "Normally open custom pad and TH pads"
SJ25 SJ33 SJ35 SJ37 SJ38 SJ39 SJ40 SJ41 SJ42 SJ43 SJ44: library part CMP-090-000001-1, Design Item ID="Solder Jumper 0603 Normally Closed", Source="Solder Jumper.SchLib"
SJ45: library part CMP-00060-2, "Normally open custom pad SMD pads"
TP1 TP2 TP3 TP4: library part CMP-075-000017-1, Manufacturer=N/A, Created by=Miguel, Design Item ID="Testpoint 35mil SMT Round", Do Not Populate="Do Not Populate", MPN=N/A, Source=Testpoint.SchLib
U1: library part CMP-00050-2, "Seeed studio XIAO series dev boards"
U2 U3 U4 U5 U6: library part CMP-007-00001-6, "NeoPixel 5050 RGB LED with Integrated Driver Chip - 10 Pack", Case/Package=1655, Color=Blue,Green,Red, Manufacturer="Adafruit Industries", Max Operating Temperature=85°C, Min Operating Temperature=-40°C, Package Description="4-Pin Surface Mount Device, Body 5 x 5 mm", Datasheet URL=http://datasheet.octopart.com/ADA1655-Adafruit-Industries-datasheet-32028139.pdf, Datasheet Version=May-13, Height=1.6mm, Interface=Serial, Length=5mm, Manufacturer URL=https://www.adafruit.com/, Mounting Technology="Surface Mount", Number of LEDs=10, Package Reference=1655, RoHS Compliant=True, Series=Neopixel, Width=5mm

## Via types
v1: diameter 0.508, hole 0.254, Top Layer to Bottom Layer, tented both sides, 106 vias
v2: diameter 0.458, hole 0.203, Top Layer to Bottom Layer, tented both sides, 2 vias

## Nets (pads, with @x,y where several pads share a name; then routed paths per layer and width w, separated by ;. In a path a pad name is that pad's centre, name@x,y a point inside that pad or via, vN(x,y) a via of type N, cw(c..) or ccw(c..) an arc to the next point about the centre after c; other vN are vias at no path point)
3V3: C1.1 C3.1 J1.2 P4.1 P4.2 P4.3 P4.4 P4.5 P4.6 P4.7 P4.8 R2.1 TP2.1 U1.12 | length 229
  Top Layer w0.381: U1.12 9.563,26.563 8.436,25.436 3.564,25.436 2,27 2,32 8.091,38.091 TP2.1 8.713,38.593 19.423,38.593 19.925,38.091 27.843,38.091 28.752,39 177.963,39 178.887,38.076 178.887,37.013 P4.8 180.34,33.942 ; P4.1 P4.2 P4.3 P4.4 P4.5 P4.6 180.34,32.783 P4.7@180.496,32.939 ; P4.7 180.34,33.942 ; C1.1@184.836,32.75 183.712,33.874 182.534,33.874 R2.1 180.34,33.942 ; C1.1 184.836,35.23 185.801,36.195 188.087,36.195 188.452,35.83 J1.2
5V: C2.1 C4.1 P3.1 P3.2 P3.3 P3.4 P3.5 P3.6 P3.7 P3.8 R1.1 SJ16.1 TP1.1 U1.14 U2.3 U3.3 U4.3 U5.3 U6.3 | length 320.9
  Top Layer w0.381: U1.14 4.483,31.483 9.26,36.26 10.465,37.465 29.465,37.465 30.1,38.1 45.72,38.1 45.732,38.088 ; U4.3 91.96,18.35 92.197,18.113 ; U5.3 90.75,25.97 91.01,25.71 91.01,25.411 92.197,24.223 92.197,18.113 ; 92.645,12.925 U3.3 88.118,13.062 88.118,14.457 86.687,15.889 84.314,15.889 83.82,16.383 83.82,18.872 83.134,19.558 79.851,19.558 78.91,18.617 78.91,17.73 U2.3 78.73,13.705 77.734,12.709 76.226,12.709 76.003,12.932 75.787,12.717 53.323,12.717 48.26,17.78 48.26,35.56 45.732,38.088 ; 92.672,12.952 93.979,12.952 ; U6.3 92.76,17.55 92.197,18.113 ; U6.3@93.979,17.541 93.979,12.952 ; 111.306,21.307 108.309,21.307 99.954,12.952 93.979,12.952 ; R1.1@172.801,34.186 175.26,34.186 ; C2.1@175.74,15.791 175.483,15.791 175.26,16.014 P3.1 P3.2 P3.3 P3.4 P3.5 P3.6 P3.7 175.26,34.186 ; 45.732,38.088 142.816,38.088 142.822,38.082 172.936,38.082 175.26,35.758 P3.8 175.26,34.186
BAT+: P17.1 U1.15 | length 27
  Bottom Layer w0.254: P17.1 2.899,37.112 3.213,37.112 3.945,36.379 3.945,33.191 3.099,32.346 3.099,26.901 6.872,23.128 11.8,18.2 U1.15
BAT-: P17.2 U1.16 | length 23.2
  Bottom Layer w0.254: P17.2 2.465,35.546 2.465,25.535 5.428,22.573 9.8,18.2 U1.16
D0: P1.1 P2.1 SJ25.1 | length 202.6
  Top Layer w0.127: SJ25.1@4.483,6.664 4.483,5.007 8.709,0.781 191.213,0.781 197.341,6.909 197.409,6.909 P2.1
  Top Layer w0.152: P2.1 198.376,7.364 200.404,7.364 P1.1
D1: P1.2 P2.2 SJ33.1 | length 199.8
  Top Layer w0.127: SJ33.1 7.035,6.62 7.035,5.92 11.259,1.696 189.656,1.696 198.008,10.048 P2.2@198.12,10.048
  Top Layer w0.152: P2.2@198.12,10.032 198.248,10.16 P1.2 ; P2.2@198.12,10.048 P2.2
D2: P1.3 P2.3 SJ35.1 | length 197.5
  Top Layer w0.127: SJ35.1 9.551,5.969 12.91,2.61 188.175,2.61 P2.3@198.12,12.554
  Top Layer w0.152: P2.3 198.12,12.572 198.248,12.7 P1.3
D3: P1.4 P2.4 SJ37.1 | length 195.2
  Top Layer w0.127: SJ37.1 12.116,5.969 14.573,3.513 186.275,3.513 197.89,15.128 P2.4@198.12,15.128
  Top Layer w0.152: P2.4@198.12,15.112 198.248,15.24 P1.4 ; P2.4@198.12,15.128 P2.4
D6: P1.7 P2.7 SJ43.1 | length 185.3
  Top Layer w0.127: SJ43.1 26.312,10.516 30.573,6.255 181.367,6.255 197.86,22.748 P2.7@198.12,22.748
  Top Layer w0.152: P2.7@198.12,22.732 198.248,22.86 P1.7 ; P2.7@198.12,22.748 P2.7
D7: P1.8 P2.8 SJ44.2 | length 199.3
  Top Layer w0.127: SJ44.2@23.763,29.602 23.622,29.743 24.105,29.743 28.543,25.305 28.543,16.452 37.839,7.157 179.877,7.157 P2.8
  Top Layer w0.152: P2.8 P1.8
D8: P1.9 P2.9 SJ42.2 | length 206.8
  Top Layer w0.127: SJ42.2@17.247,33.528 17.882,34.163 21.717,34.163 30.809,25.071 30.809,18.303 41.016,8.096 178.276,8.096 198.008,27.828 P2.9@198.12,27.828
  Top Layer w0.152: P2.9@198.12,27.812 198.248,27.94 P1.9 ; P2.9@198.12,27.828 P2.9
D9: P1.10 P2.10 SJ40.2 | length 206.9
  Top Layer w0.127: SJ40.2@14.707,33.655 14.707,34.519 15.367,35.179 22.775,35.179 24.682,33.273 48.944,9.011 176.651,9.011 198.008,30.368 P2.10@198.12,30.368
  Top Layer w0.152: P2.10@198.12,30.352 198.248,30.48 P1.10 ; P2.10@198.12,30.368 P2.10
D10: P1.11 P2.11 SJ38.2 | length 210.6
  Top Layer w0.127: SJ38.2@12.078,33.677 12.078,34.411 13.861,36.195 24.057,36.195 48.482,11.771 70.987,11.771 72.832,9.925 175.196,9.925 198.118,32.846 P2.11
  Top Layer w0.152: P2.11 P1.11
I2C.SCL: J1.4 P1.6 P2.6 SJ15.1 SJ41.1 | length 242.6
  Top Layer w0.127: SJ41.1 17.247,5.969 17.872,5.344 v1(103.451,5.344) 183.144,5.344 P2.6 ; v1(109.093,17.78) 110.043,18.73 SJ15.1
  Top Layer w0.152: J1.4 186.452,32.905 187.904,31.454 193.493,31.454 197.648,35.609 200.238,35.609 202.274,33.573 202.274,21.934 200.532,20.192 200.404,20.32 P2.6
  Bottom Layer w0.127: v1(103.451,5.344) 103.451,12.138 v1(109.093,17.78)
I2C.SDA: J1.3 P1.5 P2.5 SJ14.1 SJ39.1 | length 244.8
  Top Layer w0.127: SJ39.1 14.992,6.358 14.992,6.097 16.651,4.439 107.166,4.439 184.727,4.439 198.068,17.78 P2.5 ; v1(109.728,15.494) 110.424,16.19 SJ14.1
  Top Layer w0.152: J1.3 187.452,33.497 188.386,32.563 192.231,32.563 196.502,36.834 200.817,36.834 203.691,33.96 203.691,20.81 P1.5 200.415,18.025 198.365,18.025 P2.5
  Bottom Layer w0.127: v1(107.166,4.446) 107.166,12.932 v1(109.728,15.494)
NetCENTER_1: CENTER.1 CENTER.2 CENTER_TP.2 | length 85.3
  Top Layer w0.152: CENTER.2 CENTER.1 67.6,22.867 80.801,36.068 133.013,36.068 CENTER_TP.2
NetD1_2: D1.2 R1.2 | length 2.5
  Top Layer w0.381: R1.2 172.79,32.311 172.79,30.133 D1.2
NetD2_2: D2.2 R2.2 | length 2.3
  Top Layer w0.381: R2.2 182.385,32.061 182.385,30.146 D2.2
NetDOWN_1: DOWN.1 DOWN.2 DOWN_TP.2 | length 85.8
  Top Layer w0.152: DOWN.2 DOWN.1 73.57,13.88 74.549,14.859 74.549,16.042 77.216,18.709 77.216,24.384 87.884,35.052 128.949,35.052 DOWN_TP.2
NetLEFT_1: LEFT.1 LEFT.2 LEFT_TP.2 | length 96.3
  Top Layer w0.152: LEFT.1 LEFT.2 67.288,23.6 80.264,36.576 135.045,36.576 LEFT_TP.2
NetNeopixel_TP_2: Neopixel_TP.2 U2.2 | length 57.9
  Top Layer w0.152: U2.2 78.73,23.937 89.384,34.591 121.078,34.591 ; 121.079,34.592 121.386,34.592 127.045,34.547 127.089,34.503 129.54,32.052 Neopixel_TP.2
NetP6_1: P6.1 SJ1.2 | length 3.6
  Top Layer w0.254: SJ1.2 P6.1
NetP6_2: P6.2 SJ2.2 | length 3.6
  Top Layer w0.254: SJ2.2 P6.2
NetP6_3: P6.3 SJ3.2 | length 3.6
  Top Layer w0.254: SJ3.2 P6.3
NetP6_4: P6.4 SJ4.2 | length 3.6
  Top Layer w0.254: SJ4.2 P6.4
NetP6_5: P6.5 SJ5.2 | length 3.6
  Top Layer w0.254: SJ5.2 P6.5
NetP6_6: P6.6 SJ6.2 | length 3.6
  Top Layer w0.254: SJ6.2 P6.6
NetP6_7: P6.7 SJ7.2 | length 3.6
  Top Layer w0.254: SJ7.2 P6.7
NetP6_8: P6.8 SJ8.2 | length 3.6
  Top Layer w0.254: SJ8.2 P6.8
NetP6_9: P6.9 SJ9.2 | length 3.6
  Top Layer w0.254: SJ9.2 P6.9
NetP6_10: P6.10 SJ10.2 | length 3.6
  Top Layer w0.254: SJ10.2 P6.10
NetP6_11: P6.11 SJ11.2 | length 3.6
  Top Layer w0.152: SJ11.2 SJ11.2@212.267,33.014
  Top Layer w0.254: SJ11.2@212.267,33.014 P6.11@215.898,33.014
NetP6_12: P6.12 SJ12.2 | length 3.6
  Top Layer w0.152: SJ12.2 P6.12
NetP6_13: P6.13 SJ19.2 | length 3.6
  Top Layer w0.152: SJ19.2 P6.13
NetP7_1: P7.1 SJ20.2 | length 3.6
  Top Layer w0.152: SJ20.2 P7.1
NetP7_2: P7.2 SJ21.2 | length 3.6
  Top Layer w0.152: SJ21.2 P7.2
NetP7_3: P7.3 SJ22.2 | length 3.6
  Top Layer w0.152: SJ22.2 P7.3
NetP7_4: P7.4 SJ23.2 | length 3.6
  Top Layer w0.152: SJ23.2 P7.4
NetP7_5: P7.5 SJ24.2 | length 3.6
  Top Layer w0.152: SJ24.2 P7.5
NetP7_6: P7.6 SJ26.2 | length 3.6
  Top Layer w0.152: SJ26.2 P7.6
NetP7_7: P7.7 SJ27.2 | length 3.6
  Top Layer w0.152: SJ27.2 P7.7
NetP7_8: P7.8 SJ28.2 | length 3.6
  Top Layer w0.152: SJ28.2 P7.8
NetP7_9: P7.9 SJ29.2 | length 3.6
  Top Layer w0.152: SJ29.2 P7.9
NetP7_10: P7.10 SJ30.2 | length 3.6
  Top Layer w0.152: SJ30.2 P7.10
NetP7_11: P7.11 SJ31.2 | length 3.6
  Top Layer w0.152: P7.11 170.174,31.927 SJ31.2
NetP8_1: P8.1 P9.1 SJ18.2 | length 7.2
  Top Layer w0.254: SJ18.2 P9.1@124.42,26.35 ; P8.1@121.53,26 P8.1
NetP8_2: P8.2 P9.2 SJ17.2 | length 6.7
  Top Layer w0.254: SJ17.2 P9.2@124.42,23.81
NetP8_3: P8.3 P9.3 SJ16.2 | length 6.7
  Top Layer w0.254: SJ16.2 P9.3@124.42,21.27
NetP8_4: P8.4 P9.4 SJ15.2 | length 6.7
  Top Layer w0.254: SJ15.2 P9.4@124.42,18.73
NetP8_5: P8.5 P9.5 SJ14.2 | length 6.7
  Top Layer w0.254: 117.76,16 121.69,16 P8.5 P9.5@124.42,16.19
NetP8_6: P8.6 P9.6 SJ13.2 | length 6.7
  Top Layer w0.254: 117.774,13.636 121.866,13.636 P8.6 P9.6@124.42,13.65
NetRIGHT_1: RIGHT.1 RIGHT.2 RIGHT_TP.2 | length 75.2
  Top Layer w0.152: RIGHT.1 73.12,23.7 84.98,35.56 130.981,35.56 RIGHT_TP.2
NetSJ25_2: SJ25.2 U1.1 | length 4.2
  Top Layer w0.127: SJ25.2@4.483,8.188 U1.1
NetSJ33_2: SJ33.2 U1.2 | length 4.2
  Top Layer w0.127: SJ33.2 7.023,8.23 U1.2
NetSJ35_2: SJ35.2 U1.3 | length 4.2
  Top Layer w0.127: SJ35.2@9.563,8.193 U1.3
NetSJ37_2: SJ37.2 U1.4 | length 4.2
  Top Layer w0.127: SJ37.2@12.103,8.193 U1.4
NetSJ38_1: SJ38.1 U1.11 | length 4.5
  Top Layer w0.127: SJ38.1@12.078,32.153 12.103,32.128 U1.11
NetSJ39_2: SJ39.2 U1.5 | length 4.2
  Top Layer w0.127: U1.5 14.682,12.341 SJ39.2
NetSJ40_1: SJ40.1 U1.10 | length 4.5
  Top Layer w0.127: U1.10 14.655,27.632 SJ40.1@14.655,32.079
NetSJ41_2: SJ41.2 U1.6 | length 4.2
  Top Layer w0.127: U1.6 17.247,12.316 SJ41.2
NetSJ42_1: SJ42.1 U1.9 | length 4.4
  Top Layer w0.127: U1.9 17.227,27.664 17.227,31.994 SJ42.1
NetSJ43_2: SJ43.2 U1.7 | length 3.7
  Top Layer w0.127: U1.7 21.587,10.516 SJ43.2
NetSJ44_1: SJ44.1 U1.8 | length 3.5
  Top Layer w0.127: U1.8 19.723,28.066 21.399,29.743 SJ44.1@22.098,29.743
NetSJ45_1: SJ45.1 U6.4 | length 3.7
  Top Layer w0.127: U6.4 100.664,17.55 SJ45.1
NetU2_4: U2.4 U3.2 | length 8.5
  Top Layer w0.152: U2.4 82.169,17.411 82.169,13.811 85.25,10.73 U3.2
NetU3_4: U3.4 U4.2 | length 7.5
  Top Layer w0.152: U4.2 87.243,18.35 89.776,15.817 89.776,14.404 90.15,14.03 U3.4
NetU4_4: U4.4 U5.2 | length 6.7
  Top Layer w0.152: U5.2 85.85,25.97 86.224,25.596 86.224,25.576 90.15,21.65 U4.4
NetU5_4: U5.4 U6.2 | length 9.3
  Top Layer w0.127: U5.4 92.142,29.27 93.97,27.442 U6.2
NetUP_1: UP.1 UP.2 UP_TP.2 | length 87.8
  Top Layer w0.152: UP.2 UP.1 67.6,30.049 74.635,37.084 137.077,37.084 UP_TP.2
RTN: C1.2 C2.2 C3.2 C4.2 CENTER.3 CENTER.4 D1.1 D2.1 DOWN.3 DOWN.4 J1.1 J1.S1 J1.S2 LEFT.3 LEFT.4 P5.1 P5.2 P5.3 P5.4 P5.5 P5.6 P5.7 P5.8 RIGHT.3 RIGHT.4 SJ17.1 TP3.1 TP4.1 U1.13 U2.1 U3.1 U4.1 U5.1 U6.1 UP.3 UP.4
  other v1: 45.445,1.238 97.117,1.238 148.061,1.238 45.798,2.153 96.745,2.153 148.053,2.153 46.209,3.055 97.098,3.067 148.406,3.067 97.509,3.97 148.817,3.97 59.311,3.982 110.619,3.982 161.927,3.982 57.011,4.887 108.319,4.887 159.627,4.887 198.12,5.08 208.28,5.08 47.786,5.798 99.094,5.798 150.402,5.798 157.232,5.801 70.274,6.699 99.086,6.712 121.582,6.699 150.394,6.712 70.266,7.614 121.574,7.614 172.882,7.614 66.017,7.639 117.325,7.639 66.009,8.554 67.016,8.554 117.317,8.554 118.324,8.554 168.625,8.554 199.328,9.015 67.008,9.468 118.316,9.468 120.56,9.468 169.624,9.468 120.552,10.382 171.86,10.382 69.342,10.795 58.913,10.926 69.285,11.313 199.005,11.38 71.628,12.065 86.741,12.319 199.009,13.97 70.104,14.732 54.864,14.859 20.32,15.24 40.64,15.24 60.96,15.24 81.28,15.24 132.08,15.24 142.24,15.24 172.72,15.24 203.2,15.24 75.946,15.748 179.324,15.748 109.218,15.887 107.021,16.355 199.009,16.383 60.452,17.018 67.691,17.018 181.864,17.526 199.136,24.13 71.12,25.019 54.864,25.273 15.24,25.4 25.4,25.4 45.72,25.4 55.88,25.4 66.04,25.4 76.2,25.4 96.52,25.4 106.68,25.4 127,25.4 187.96,25.4 82.804,25.908 58.928,26.162 69.088,26.416 172.212,26.543 181.737,26.543 184.785,29.972 24.037,30.853 93.345,32.131 189.992,33.02 190.5,34.29 21.806,34.603 10.668,35.433 22.864,35.619 200.387,36.051 24.146,36.635 200.966,37.275 176.784,37.338 9.128,37.449 6.477,37.719 182.499,38.1
  other v2: 185.152,38.435 190.752,38.435
pads on no net: CENTER_TP.1 DOWN_TP.1 J2.1 J2.2 J2.3 J2.A1 J2.A2 J2.A3 J2.A4 J2.A5 J2.A6 J2.A7 J2.B1 J2.B2 J2.B3 J2.B4 J2.B5 J2.B6 J2.B7 J2.C1 J2.C2 J2.C3 J2.C4 J2.C5 J2.C6 J2.C7 LEFT_TP.1 MH3.1 MH4.1 MH5.1 MH6.1 MH7.1 MH8.1 MH9.1 MH10.1 Neopixel_TP.1 RIGHT_TP.1 SJ1.1 SJ2.1 SJ3.1 SJ4.1 SJ5.1 SJ6.1 SJ7.1 SJ8.1 SJ9.1 SJ10.1 SJ11.1 SJ12.1 SJ13.1 SJ18.1 SJ19.1 SJ20.1 SJ21.1 SJ22.1 SJ23.1 SJ24.1 SJ26.1 SJ27.1 SJ28.1 SJ29.1 SJ30.1 SJ31.1 SJ45.2 UP_TP.1

## Polygon pours and split planes (outlines as drawn)
RTN on Bottom Layer "BOT_GND" (solid, remove dead copper, pour order 5): 0,-0.026 218,-0.026 218.026,0 218.026,40 218,40.026 24.376,40.026 24.349,40 cw(c23,40) 21.651,40 21.625,40.026 0,40.026 -0.026,40
RTN on Top Layer "TOP_GND" (solid, remove dead copper, pour order 4): 0,-0.026 218,-0.026 218.026,0 218.026,40 218,40.026 24.376,40.026 24.349,40 cw(c23,40) 21.651,40 21.625,40.026 0,40.026 -0.026,40

## Silkscreen, mask and mechanical layers (free items; w line width, h text height)
Top Overlay:
  drawing of 356 lines, arcs and shapes, not listed
  text "RTN" at 4.064,38.735 h1
  text "Button TPs" at 134.983,38.47 h1
  text "3V3" at 8.91,38.011 h1
  text "13" at 213.757,37.801 h1
  text "Breakout Boards" at 150.808,37.374 h2
  text "BAT+" at 3.556,37.338 h1
  text "GITHUB REPO" at 31.691,36.724 h2
  text ".ProjectRevision" at 199.136,36.576 h3.17
  text "5V" at 10.16,35.953 h1
  text "ME218 Alumni BBQ 2025" at 81.988,35.402 h4
  text "12" at 213.749,35.255 h1
  text "BAT-" at 3.556,35.179 h1
  text "11" at 213.783,32.72 h1
  text "D10" at 193.25,32.416 h2
  text "D10" at 11.29,31.279 h1 r90
  text "D9" at 13.831,31.279 h1 r90
  text "D8" at 16.369,31.279 h1 r90
  text "VERDANA FONT HEIGHT" at 70.569,31.031 h1.15
  text "SCL" at 186.751,31.045 h1 r90
  text "SDA" at 187.766,31.045 h1 r90
  text "PWR" at 188.758,31.045 h1 r90
  text "RTN" at 189.751,31.045 h1 r90
  text "D7" at 21.082,30.607 h1
  text "10" at 213.749,30.181 h1
  text "D9" at 194.297,29.881 h2
  text "/ 80mil" at 76.919,29.339 h2.03
  text "2.0mm" at 70.569,29.252 h2
  text "/ 60mil" at 75.141,27.942 h1.52
  text "1.5mm" at 70.569,27.885 h1.5
  text "9" at 214.206,27.64 h1
  text "D8" at 194.287,27.342 h2
  text "/ 40mil" at 73.871,26.801 h1.02
  text "1.0mm" at 70.569,26.757 h1
  text "/ 20mil" at 72.347,26.166 h0.51
  text "0.5mm" at 70.569,26.144 h0.5
  text "n.c." at 108.237,26.069 h1
  text "n.c." at 126.167,26.069 h1
  text "8" at 214.205,25.101 h1
  text "D7" at 194.292,24.802 h2
  text "5V" at 173.558,23.834 h2 r90
  text "RTN" at 108.237,23.455 h1
  text "RTN" at 126.167,23.455 h1
  text "3V3" at 183.459,22.862 h2 r90
  text "Keep your friends close  / and your return closer." at 131.064,22.606 h2
  text "7" at 214.221,22.561 h1
  text "D6" at 194.278,22.405 h2
  text "5V" at 108.237,20.921 h1
  text "5V" at 126.167,20.921 h1
  text "SCL" at 192.323,20.136 h1
  text "6" at 214.206,20.022 h1
  text "D5" at 194.305,19.876 h2
  text "Debugging 101" at 128.608,19.183 h2
  text "SCL" at 108.237,18.375 h1
  text "SCL" at 126.167,18.375 h1
  text "V=IR / P=IV" at 35.433,17.907 h2
  text "5" at 214.24,17.487 h1
  text "Solder / Me / First" at 61.08,17.456 h1
  text "Solder / Me / First" at 85.08,17.456 h1
  text "- Check Power & Return" at 128.608,17.444 h1
  text "SDA" at 192.17,17.451 h1
  text "D4" at 194.268,17.323 h2
  text "BAT-" at 9.055,16.537 h0.8
  text "BAT+" at 10.945,16.537 h0.8
  text "- Talk to someone" at 128.608,15.966 h1
  text "SDA" at 108.237,15.835 h1
  text "SDA" at 126.167,15.835 h1
  text "4" at 214.178,14.941 h1
  text "D3" at 194.313,14.783 h2
  text "- Take a nap" at 128.608,14.436 h1
  text "FR-4 εr ≈ 4.2" at 25.013,14.258 h2
  text "n.c." at 108.237,13.369 h1
  text "n.c." at 126.167,13.369 h1
  text "5V" at 175.889,12.64 h2 r90
  text "3" at 214.236,12.401 h1
  text "tpd ≈ 0.2 ns/in" at 24.13,12.367 h2
  text "D2" at 194.295,12.231 h2
  text "3V3" at 180.972,11.712 h2 r90
  text "RTN" at 178.44,11.35 h2 r90
  text "(λg) wavelength" at 42.164,10.848 h2
  text "2" at 214.225,9.934 h1
  text "D1" at 194.364,9.701 h2
  text "D6" at 20.955,9.41 h1
  text "(tpd) time propagation delay" at 35.306,8.56 h2
  text "Signals electrically long ≥ ~1/10 of the signal’s wavelength (λ)" at 130.078,8.551 h2
  text "Assumes shared relativistic frame" at 95.314,8.508 h2
  text "D0" at 3.675,7.741 h1 r90
  text "D1" at 6.253,7.741 h1 r90
  text "D2" at 8.818,7.741 h1 r90
  text "D3" at 11.371,7.741 h1 r90
  text "D4" at 13.949,7.741 h1 r90
  text "D5" at 16.502,7.741 h1 r90
  text "1" at 214.306,7.32 h1
  text "RTN" at 1.143,7.228 h1 r90
  text "D0" at 194.297,7.163 h2
  text "0.2ns" at 24.384,6.305 h1
  text "0.4ns" at 49.73,6.307 h1
  text "0.6ns" at 75.053,6.305 h1
  text "0.8ns" at 100.407,6.307 h1
  text "1.0ns" at 125.707,6.303 h1
  text "1.2ns" at 151.098,6.306 h1
  text "1.4ns" at 176.406,6.311 h1
  text "Breakout Boards" at 203.894,4.989 h2
  text "5GHz / WiFi" at 26.797,4.136 h2
  text "2.4GHz / BLE" at 58.928,4.131 h2
  text "0.9GHz / RFID" at 159.893,4.136 h2
Bottom Overlay:
  drawing of 919 lines, arcs and shapes, not listed
  text "BAT+" at 5.982,37.321 h1
  text "BAT-" at 5.982,35.162 h1
  text "BAT-" at 10.545,16.537 h0.8
  text "BAT+" at 12.655,16.537 h0.8
Board outline (optional, doesn't get exported!):
  lines w0.2: 218,35 218,0 ; 0,0 218,0 ; 0,0 218,0 ; 0,0 0,40 21.625,40 ccw(c23,40) 24.375,40 218,40 218,0
Mechanical 22:
  drawing of 9 lines, arcs and shapes, not listed
Sheet:
  lines w0.051: -12.122,14.625 19.878,14.625 ; -24.352,-25.375 -24.352,-24.374 -24.152,-24.374 -24.152,-25.375 -24.352,-25.375 ; -22.765,-25.375 -22.765,-24.374 -22.564,-24.374 -22.564,-25.375 -22.765,-25.375 ; -21.177,-25.375 -21.177,-24.374 -20.977,-24.374 -20.977,-25.375 -21.177,-25.375 ; -19.59,-25.375 -19.59,-24.374 -19.389,-24.374 -19.389,-25.375 -19.59,-25.375 ; -18.537,-8.114 -18.537,0.459 -9.965,0.459 -9.965,-8.114 -18.537,-8.114 ; -18.002,-25.375 -18.002,-24.374 -17.802,-24.374 -17.802,-25.375 -18.002,-25.375 ; -16.415,-25.375 -16.415,-24.374 -16.214,-24.374 -16.214,-25.375 -16.415,-25.375 ; -14.827,-25.375 -14.827,-24.374 -14.627,-24.374 -14.627,-25.375 -14.827,-25.375 ; -13.24,-25.375 -13.24,-24.374 -13.039,-24.374 -13.039,-25.375 -13.24,-25.375 ; -11.652,-25.375 -11.652,-24.374 -11.452,-24.374 -11.452,-25.375 -11.652,-25.375 ; -10.065,-25.375 -10.065,-24.374 -9.864,-24.374 -9.864,-25.375 -10.065,-25.375 ; -8.477,-25.375 -8.477,-24.374 -8.277,-24.374 -8.277,-25.375 -8.477,-25.375 ; -6.89,-25.375 -6.89,-24.374 -6.689,-24.374 -6.689,-25.375 -6.89,-25.375 ; -5.302,-25.375 -5.302,-24.374 -5.102,-24.374 -5.102,-25.375 -5.302,-25.375 ; -3.715,-25.375 -3.715,-24.374 -3.514,-24.374 -3.514,-25.375 -3.715,-25.375 ; -2.127,-25.375 -2.127,-24.374 -1.927,-24.374 -1.927,-25.375 -2.127,-25.375 ; -0.54,-25.375 -0.54,-24.374 -0.339,-24.374 -0.339,-25.375 -0.54,-25.375
Mechanical 25:
  circle w0.254: c50.71,24 r1.25
  circle w0.254: c23,8 r1.25
  circle w0.254: c31.28,9.09 r1.25
  circle w0.254: c39,12.29 r1.25
  circle w0.254: c45.63,17.37 r1.25
  circle w0.254: c53.91,31.72 r1.25
  circle w0.254: c23,40 r1.25

## Text inside footprints (layer, text, board x,y; h text height)
J2: Top Overlay "0.7 mm pad height" at 171.16,13.23 h1 r90; Top Overlay "q" at 163.55,21.524 h1; Top Overlay "n" at 161.678,21.358 h1; Top Overlay "o" at 162.285,21.371 h1; Top Overlay "p" at 162.926,21.524 h1; Top Overlay "r" at 164.175,21.358 h1; Top Overlay "s" at 164.697,21.369 h1; Top Overlay "t" at 165.282,21.367 h1; Top Overlay "u" at 165.807,21.371 h1; Top Overlay "v" at 166.413,21.358 h1; Top Overlay "w" at 167.076,21.358 h1; Top Overlay "x" at 167.886,21.358 h1; Top Overlay "y" at 168.549,21.524 h1; Top Overlay "z" at 169.212,21.358 h1; Top Overlay "7" at 144.025,12.722 h1; Top Overlay "2" at 144.025,19.072 h1; Top Overlay "3" at 144.025,17.815 h1; Top Overlay "1" at 144.025,20.342 h1; Top Overlay "A" at 144.887,21.34 h1; Top Overlay "B" at 146.157,21.34 h1; Top Overlay "C" at 147.427,21.351 h1; Top Overlay "D" at 148.697,21.34 h1; Top Overlay "E" at 149.967,21.34 h1; Top Overlay "F" at 151.237,21.34 h1; Top Overlay "G" at 152.507,21.352 h1; Top Overlay "H" at 153.777,21.34 h1; Top Overlay "I" at 155.047,21.34 h1; Top Overlay "J" at 156.317,21.349 h1; Top Overlay "K" at 157.587,21.34 h1; Top Overlay "L" at 158.857,21.34 h1; Top Overlay "M" at 160.127,21.34 h1; Top Overlay "4" at 144.025,16.532 h1; Top Overlay "5" at 144.025,15.275 h1; Top Overlay "6" at 144.025,14.005 h1; Top Overlay "50 mil pitch" at 150.629,11.491 h1; Top Overlay "25 mil pitch" at 163.075,11.491 h1
U1: 3D Bodies Top "JP1" at 21.247,13.65 h1.38 r270; 3D Bodies Top "JP2" at 21.247,28.255 h1.38 r270